# EAGLE board EE-SX1131 (EAGLE 6.4)
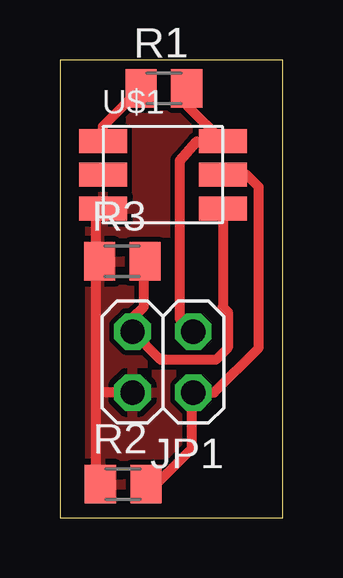
[diagram p0: board, top side]

Size 9.3 x 19.1 mm. Coordinates in mm from the lower left corner, seen from the top.
Outline: 0,0 9.3,0 9.3,19.1 0,19.1 0,0
Copper layers (1*16): Top 0.035mm / dielectric 1.5mm / Bottom 0.035mm
Design rules "default *": minimum track width 10mil, minimum drill 24mil, track to track 8mil, track to pad 8mil, pad to pad 8mil, via to via 8mil, smd to smd 8mil, copper to edge 40mil, drill to drill 8mil, minimum pad ring 10mil, minimum via ring 8mil, stop-mask expansion 4mil, vias tented up to drill 0mil, thermal gap 10mil

## Footprints (pad centres in the part's own frame; a part is rotated, then mirrored left to right if it is on the bottom)
2X02 = drill 1.016 octagon: 1 -1.27,-1.27; 2 -1.27,1.27; 3 1.27,-1.27; 4 1.27,1.27
M0805 = smd 1.3 x 1.6: 1 -0.95,0; 2 0.95,0
EE-SX1131 = smd 2 x 1: A -2.5,1.4; C 2.5,1.4; E1 2.5,0; E2 2.5,-1.4; K -2.5,-1.4; NC -2.5,0

## Placement (x,y rotation side)
JP1  [2X02]  4.3,6.5 180 top
R1  220R  [M0805]  4.34,17.92 0 top
R2  20k  [M0805]  2.64,1.41 0 top
R3  20k  [M0805]  2.6,10.7 0 top
U$1  EE-SX1131  [EE-SX1131]  4.3,14.31 0 top

## Library data of the parts
JP1 = pinhead
R1-R3 = rcl
U$1 = BEEP

## Nets
GND: JP1.4 R2.1 R3.1 U$1.K
N$1: R1.1 U$1.A
N$2: JP1.3 R3.2 U$1.E2
N$3: JP1.2 R2.2 U$1.E1
VCC: JP1.1 R1.2 U$1.C

## Tracks (layer width: path | path; a pad name or v marks a point on that pad's centre or on a via)
GND
  Top 0.406: 1.3,1.6 1.5,2 1.5,5.5 | 1.5,5.5 1.5,10.85 | 1.5,10.85 R3.1 | 1.5,10.85 1.5,12.61 | JP1.4 1.77,5.23 1.5,5.5
  Top 0.61: 1.5,12.61 U$1.K
  pour Top: 0,0 9.3,0 9.3,19.1 0,19.1
N$1
  Top 0.406: U$1.A 1.8,16.33 R1.1
N$2
  Top 0.406: R3.2 3.5,10.25 3.5,8.8 3.03,8.33 JP1.3 4.2,6.6 6.5,6.6 7,7.1 7,8.6 6.8,8.8 U$1.E2
N$3
  Top 0.406: U$1.E1 7.8,14.3 8.3,13.8 8.3,7.1 6.43,5.23 JP1.2 5.5,5.16 5.5,2.9 4.01,1.41 R2.2
  Top 0.61: U$1.E1
VCC
  Top 0.406: JP1.1 5.47,7.73 5,8.3 5,14.9 5.7,15.7 U$1.C | R1.2 5.29,17.22 U$1.C
  Top 0.61: U$1.C